# Altium PCB EtherWizA4.PcbDoc
Units mil, origin at the board's own origin, x right, y up, seen from the top; angles counter-clockwise.
Board outline 4763.78 x 2346.46 mil, 5 copper layers (Top Layer, GND, 5V, Mid-Layer 5, Bottom Layer), stack 36.923 mil thick; 51 components, 123 nets, 250 pads, 111 vias.
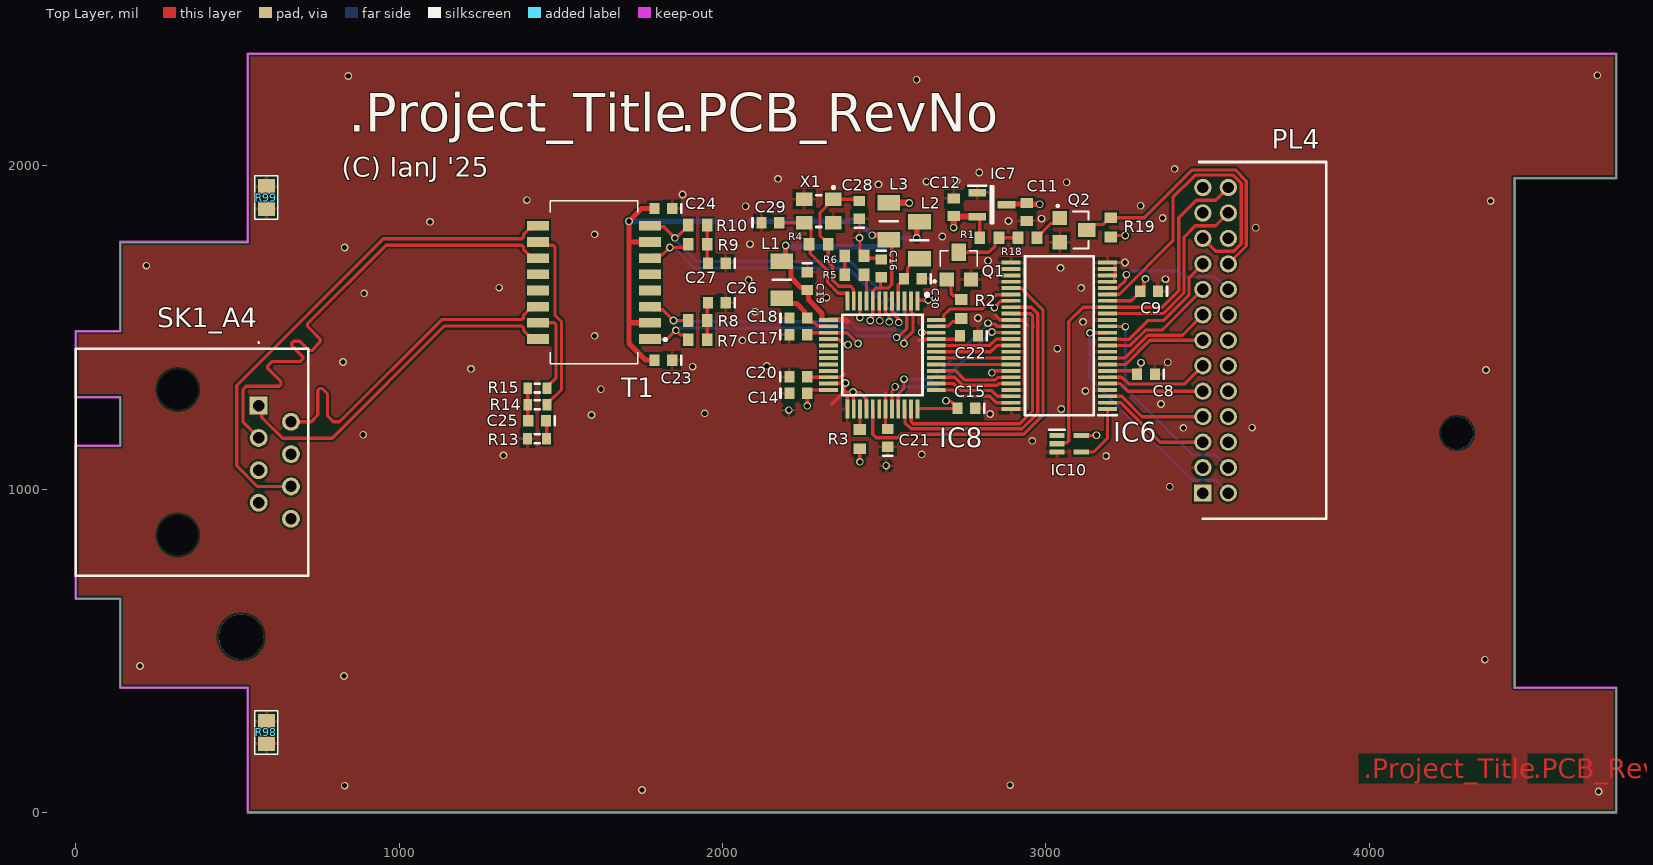
[diagram p0: Top Layer view]
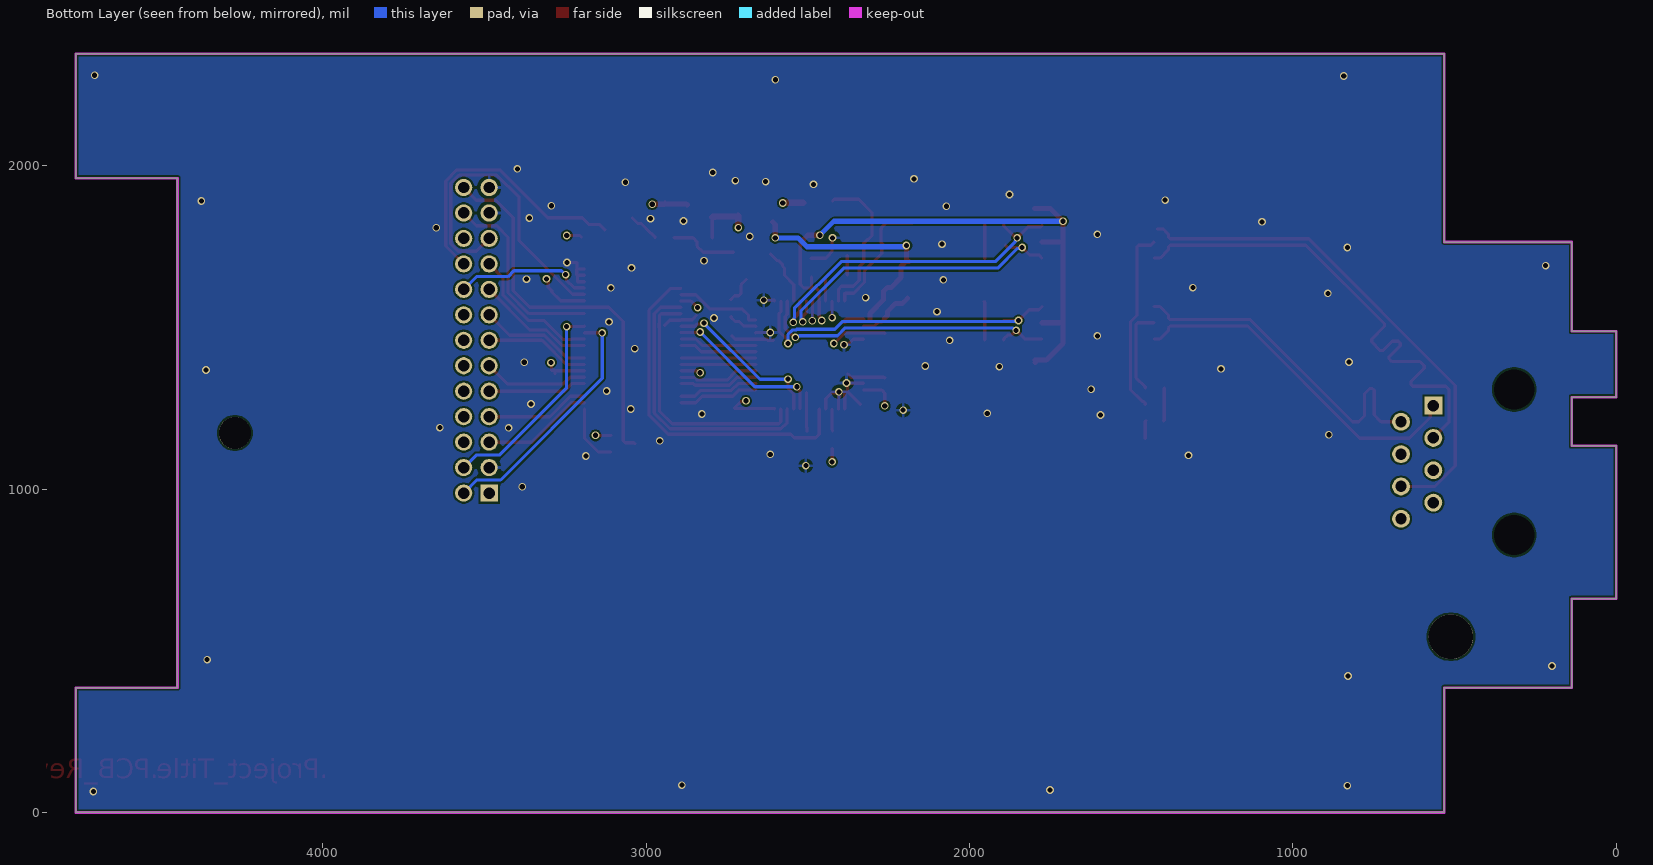
[diagram p1: Bottom Layer view, seen from below]
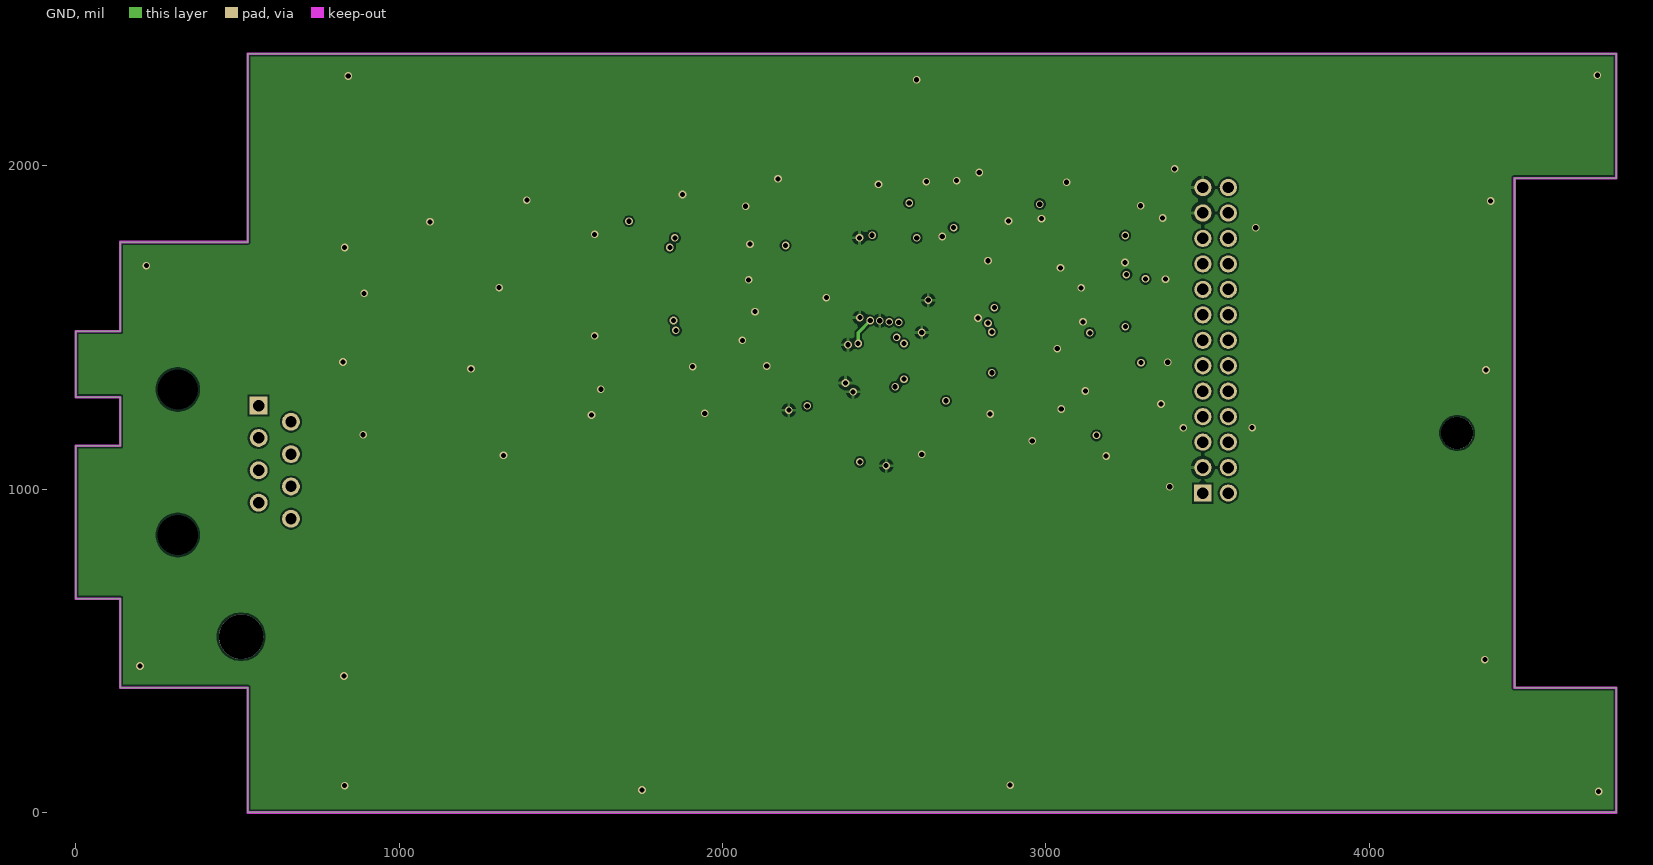
[diagram p2: GND]
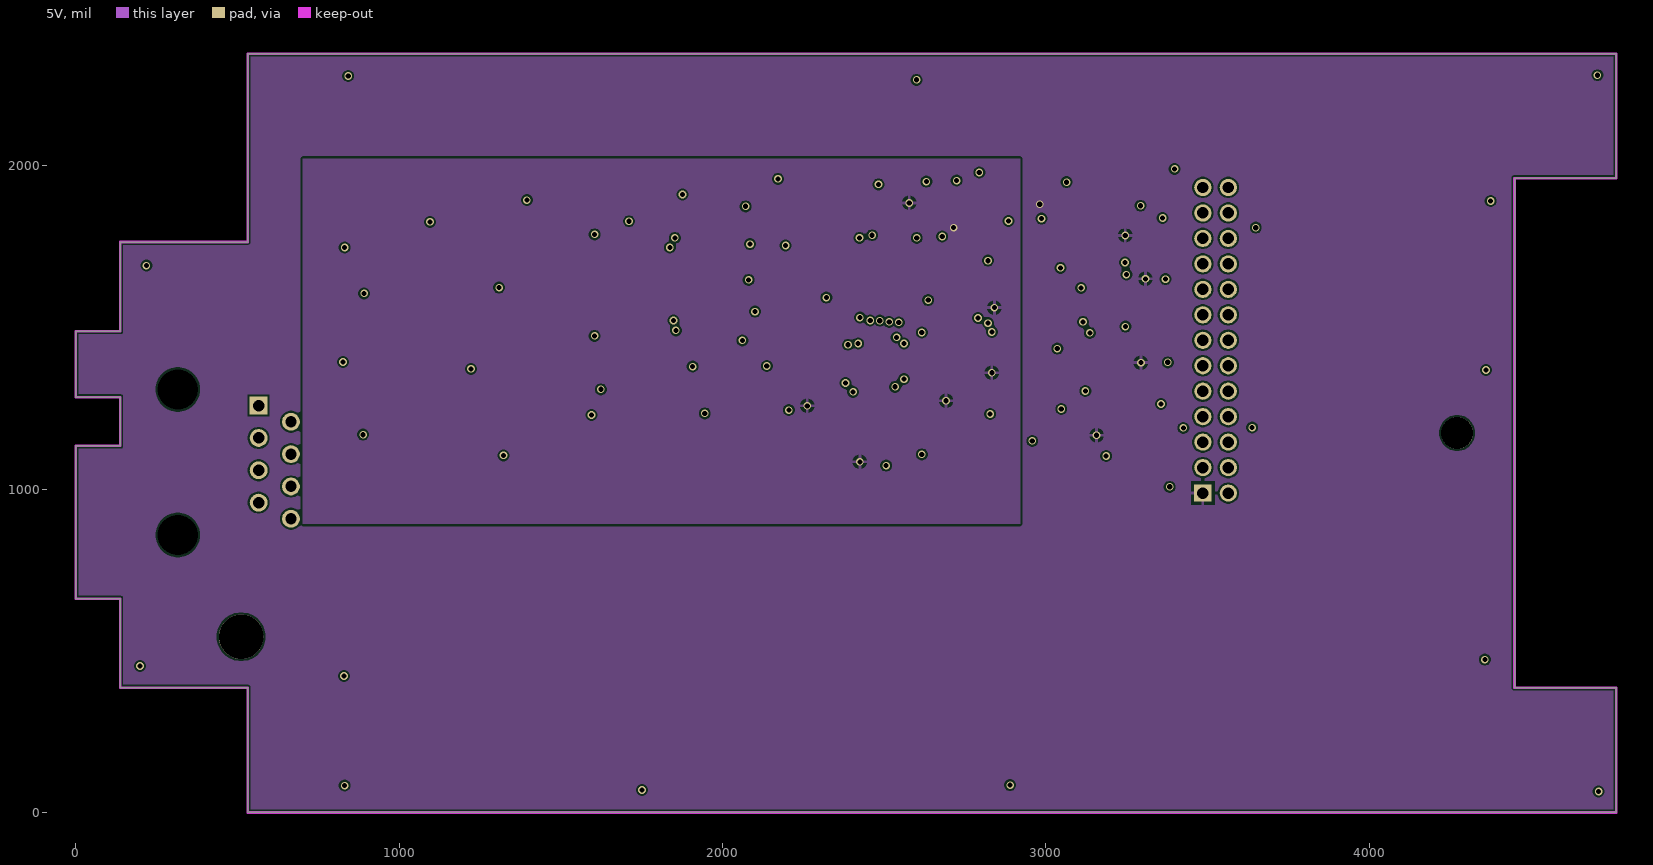
[diagram p3: 5V]
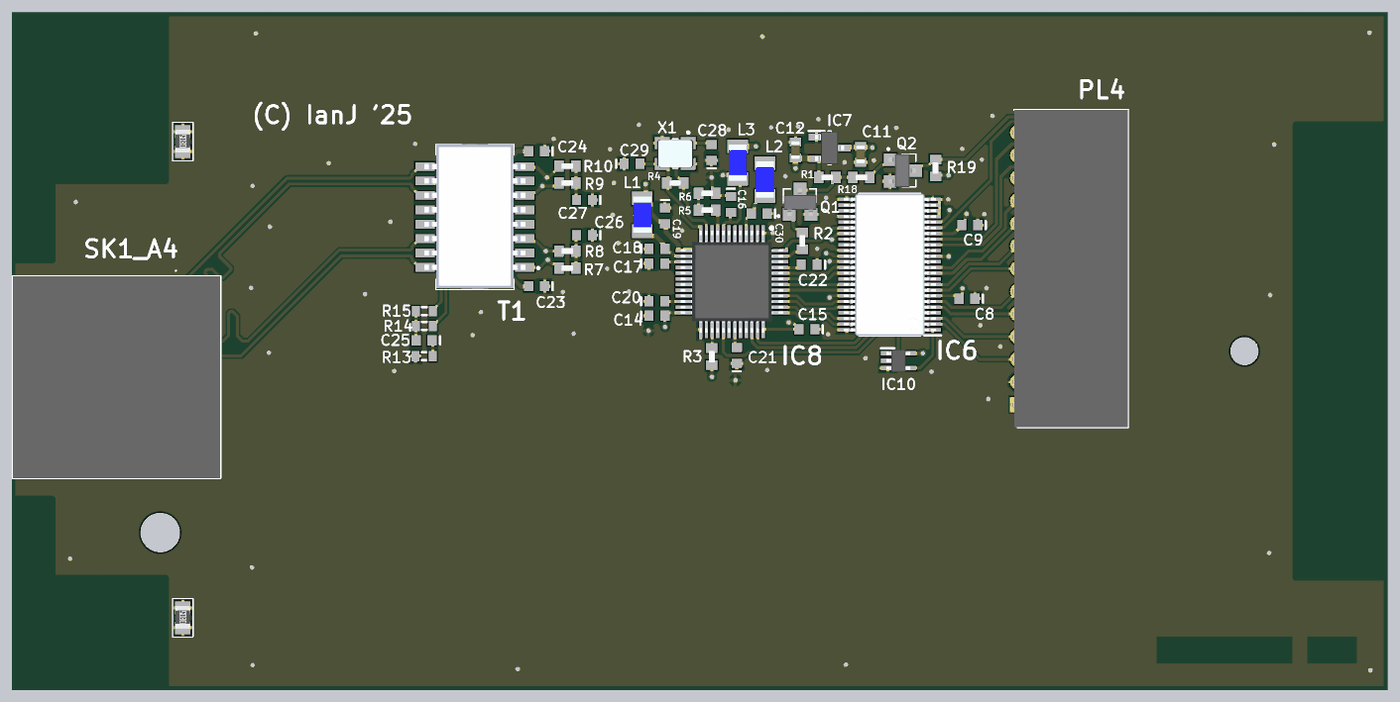
[diagram p4: 3D render of the assembled board from above, using the file's embedded part models]

## Layer stack, top to bottom
Top Solder: solder mask 0.4, Solder Resist, Dk 3.5
Top Layer: signal copper 1.4
Dielectric 1: prepreg 2.8, PP-006, Dk 4.1
GND: signal copper 1.378
Dielectric 2: prepreg 11.811, PP-006, Dk 4.1
5V: signal copper 1.378
Dielectric2: dielectric 12.6, FR-4, Dk 4.8
Mid-Layer 5: signal copper 1.4
Dielectric4: dielectric 2.7559, FR-4, Dk 4.8
Bottom Layer: signal copper 1.4
Bottom Solder: solder mask 0.4, Solder Resist, Dk 3.5

## Board outline
138.17,385.83 138.17,661.42 0.37,661.42 0.37,1133.86 138.17,1133.86 138.17,1283.46 0.37,1283.46 0.37,1488.19 138.17,1488.19 138.17,1763.78 531.87,1763.78 531.87,2346.46 4764.15,2346.46 4764.15,1960.63 4449.19,1960.63 4449.19,385.83 4764.15,385.83 4764.15,0 531.87,0 531.87,385.83

## Design rules (kind name [scope] priority, off if disabled: settings)
Clearance [All] p1: gap=5.91 ignorepadtopadclearanceinfootprint=FALSE
DiffPairsRouting [All] p1: maxlimit=10 minlimit=10 mostfreqgap=10 toplayer_minwidth=10 toplayer_maxwidth=15 toplayer_prefwidth=10 midlayer1_minwidth=10 midlayer1_maxwidth=15 midlayer1_prefwidth=10 midlayer2_minwidth=10 midlayer2_maxwidth=15 midlayer2_prefwidth=10 midlayer5_minwidth=10 midlayer5_maxwidth=15 midlayer5_prefwidth=10 bottomlayer_minwidth=10 bottomlayer_maxwidth=15 bottomlayer_prefwidth=10 maxuncoupledlength=500
HoleSize [All] p1: absolutevalues=TRUE maxlimit=157.48 minlimit=1 maxpercent=80.000 minpercent=20.000
MinimumSolderMaskSliver [All] p1: minsoldermaskwidth=1
PolygonConnect [All] p1: connectstyle=Relief reliefconductorwidth=10 reliefentries=4 polygonreliefangle="90 Angle" airgapwidth=10
RoutingVias [All] p1: holewidth=28 width=50 viastyle="Through Hole" minholewidth=15 minwidth=20 maxholewidth=28 maxwidth=50
SilkToSilkClearance [All] p1: silktosilkclearance=3.94
SilkToSolderMaskClearance [IsPad] p1: minsilkscreentomaskgap=3.94 clearancetoexposedcopper=TRUE
SolderMaskExpansion [All] p1: expansion=4 istentingtop=FALSE
SupplyNets "Schematic Supply Nets_9" [InNet('12V')] p1: voltage=0.000
SupplyNets "Schematic Supply Nets_8" [InNet('1v2d')] p2: voltage=0.000
SupplyNets "Schematic Supply Nets_7" [InNet('3v3a')] p3: voltage=0.000
SupplyNets "Schematic Supply Nets_6" [InNet('-5V')] p4: voltage=0.000
SupplyNets "Schematic Supply Nets_5" [InNet('1v2o')] p5: voltage=0.000
SupplyNets "Schematic Supply Nets_4" [InNet('GND_CHASS')] p6: voltage=0.000
SupplyNets "Schematic Supply Nets_3" [InNet('GND')] p7: voltage=0.000
SupplyNets "Schematic Supply Nets_2" [InNet('1v2a')] p8: voltage=0.000
SupplyNets "Schematic Supply Nets_1" [InNet('3v3')] p9: voltage=0.000
SupplyNets "Schematic Supply Nets" [InNet('5V')] p10: voltage=0.000
Width [All] p1: maxlimit=19.68 minlimit=10 preferedwidth=10
25 further rules are at their usual default settings.

## Classes and differential pairs
component class EtherWiz: C8 C9 C11 C12 C14 C15 C16 C17 C18 C19 C20 C21 C22 C23 C24 C26 C27 C28 C29 C30 IC6 IC7 IC8 IC10 L1 L2 L3 PL4 Q1 Q2 R1 R2 R3 R4 R5 R6 R7 R8 R9 R10 R14 R15 R18 R19 T1 X1
differential pair TX: +TX_P -TX_N
differential pair RX: +RX_P -RX_N
differential pair ETX: +ETX_P -ETX_N
differential pair ERX: +ERX_P -ERX_N

## Components (designator, comment, footprint, x,y, rotation, side; value= is the part's Value field where it differs from the comment)
C8 "100n" CAPC1608L 3309.48,1355.61 r180 top
C9 "100n" CAPC1608L 3319.46,1611.34 r180 top
C11 "1uF" CAPC1608X90N 2940.52,1856.78 r90 top
C12 "1uF" CAPC1608X90N 2714.99,1871.35 r270 top
C14 "100n" CAPC1608L 2234.68,1296.55 r0 top
C15 "100n" CAPC1608L 2754.36,1249.31 r180 top
C16 "100n" CAPC1608L 2490.58,1682.38 r270 top
C17 "100n" CAPC1608L 2234.53,1477.61 r0 top
C18 "100nF" CAPC1608L 2234.68,1528.83 r0 top
C19 "100nF" CAPC1608L 2262.24,1643.01 r270 top
C20 "100nF" CAPC1608L 2234.53,1346.61 r0 top
C21 "100nF" CAPC1608L 2511.25,1158.2 r90 top
C22 "100nF" CAPC1608L 2762.24,1473.72 r180 top
C23 "100nF" CAPC1608L 1817.35,1398.91 r180 top
C24 "100nF" CAPC1608L 1817.35,1867.42 r180 top
C25 "1nF" CAPC1608L 1427,1211 r180 top
C26 "100nF" CAPC1608L 1982.71,1576.08 r180 top
C27 "100nF" CAPC1608L 1982.71,1698.13 r180 top
C28 "24pF" CAPC1608L 2423.65,1863.48 r90 top
C29 "24pF" CAPC1608L 2148.06,1824.11 r0 top
C30 "100nF" CAPC1608L 2589.01,1650.88 r180 top
IC6 "74ALVC164245DGG_11" SOP50P810X120-48N 3041.76,1473.72 r180 top
IC7 "MCP1703AT-3302E_CB" SOT95P255X145-3N 2833.1,1879.23 r0 top
IC8 "W6100L" QFP50P900X900X160-48N 2494.52,1414.66 r270 top
IC10 "SN74LVC1G04DCKR" SOT65P210X110-5N 3072,1140 r0 top
L1 "782763800" INDC3216X130N 2183.5,1646.95 r90 top
L2 "782763800" INDC3216X130N 2608.69,1768.99 r270 top
L3 "782763800" INDC3216X130N 2514.2,1828.05 r270 top
PL4 "DF11-26DP-2DS_52_" SHDRRA26W50P200_2X13_2800X1000X500P 3485.41,987.56 r270 top locked
Q1 "BC846" SOT-23 2730.74,1690.25 r0 top
Q2 "BC846" SOT-23 3085.07,1800.49 r270 top
R1 "100K" RESC1608X50N 2825.23,1776.87 r180 top
R2 "2K2" RESC1608X50N 2738.61,1556.39 r90 top
R3 "2K2" RESC1608X50N 2424.63,1154.27 r270 top
R4 "1M" RESC1608X50N 2297.67,1757.18 r0 top
R5 "12K" RESC1608X50N 2407.91,1662.69 r0 top
R6 "300R" RESC1608X50N 2407.91,1721.75 r180 top
R7 "50R" RESC1608X50N 1923.65,1461.91 r180 top
R8 "50R" RESC1608X50N 1923.65,1520.96 r180 top
R9 "50R" RESC1608X50N 1923.65,1757.18 r180 top
R10 "50R" RESC1608X50N 1923.65,1816.24 r180 top
R13 "0R" RESC1608L 1427,1156 r0 top
R14 "75R" RESC1608L 1427.59,1261.12 r0 top
R15 "75R" RESC1608L 1427.59,1312.3 r0 top
R18 "2K2" RESC1608X50N 2943.34,1776.87 r0 top
R19 "100K" RESC1608X50N 3200.39,1809.07 r270 top
R98 "0R" "RES 0805" 590.15,247.46 r90 top
R99 "0R" "RES 0805" 590.16,1901.16 r90 top
SK1_A4 "MTJ-880X1" MTJ880X1 566,1258 r270 top locked
T1 "PT61017PEL" PT61017PEL 1628.38,1639.07 r90 top
X1 "25MHz" ABM810000MHZ12D2W 2297.67,1859.54 r180 top

## Footprints (in the part's own frame and the unit in brackets; to place one, negate y for a bottom-side part, rotate by r counter-clockwise, add the part's x,y. Pads: shape width x height; smd on the part's side, far side on the other; paste and mask are expansions set on the pad)
ABM810000MHZ12D2W [mm]
  rect 1.3x1.05 smd: 1(-1.15,-0.925) 2(1.15,-0.925) 3(1.15,0.925) 4(-1.15,0.925)
  silkscreen extent -1.25,-1.95 0.2,1.25, body extent -1.6,-1.25 1.6,1.25, height 0.8
CAPC1608L [mm] "Chip Capacitor, Body 1.6x0.8mm, IPC High Density"
  rect 0.8x0.9 smd: 1(-0.7,0) 2(0.7,0)
  silkscreen extent -1.4,-0.35 -1.4,0.35, body extent -0.87,-0.48 0.87,0.48, height 0.85
CAPC1608X90N [mm]
  rect 0.78x0.99 smd: 1(-0.7,0) 2(0.7,0)
  body extent -0.8,-0.41 0.8,0.41, height 0.9
INDC3216X130N [mm]
  rect 1.2x1.8 smd: 1(-1.45,0) 2(1.45,0)
  silkscreen extent 0,-0.7 0,0.7, body extent -1.6,-0.8 1.6,0.8, height 1.3
MTJ880X1 [mm]
  rect 1.4x1.4 hole 0.9: 1(0,0)
  round 1.4 hole 0.9: 2(1.27,2.54) 3(2.54,0) 4(3.81,2.54) 5(5.08,0) 6(6.35,2.54) 7(7.62,0) 8(8.89,2.54)
  round 1.585 hole 3.17 unplated: MH1(-1.27,-6.35) MH2(10.16,-6.35)
  silkscreen extent -5,-14.35 13.34,3.91, body extent -4.45,-14.35 13.34,3.91, height 13.08
PT61017PEL [mm]
  rect 0.76x1.7 smd: 1(-4.445,-3.75) 2(-3.175,-3.75) 3(-1.905,-3.75) 4(-0.635,-3.75) 5(0.635,-3.75) 6(1.905,-3.75) 7(3.175,-3.75) 8(4.445,-3.75) 9(4.445,5.05) 10(3.175,5.05) 11(1.905,5.05) 12(0.635,5.05) 13(-0.635,5.05) 14(-1.905,5.05) 15(-3.175,5.05) 16(-4.445,5.05)
  silkscreen extent -6.4,-5.05 6.4,4.1, body extent -6.33,-3.8 6.45,5.1, height 5.14
QFP50P900X900X160-48N [mm]
  rect 1.475x0.3 smd: 1(-4.238,2.75) 2(-4.238,2.25) 3(-4.238,1.75) 4(-4.238,1.25) 5(-4.238,0.75) 6(-4.238,0.25) 7(-4.238,-0.25) 8(-4.238,-0.75) 9(-4.238,-1.25) 10(-4.238,-1.75) 11(-4.238,-2.25) 12(-4.238,-2.75) 25(4.238,-2.75) 26(4.238,-2.25) 27(4.238,-1.75) 28(4.238,-1.25) 29(4.238,-0.75) 30(4.238,-0.25) 31(4.238,0.25) 32(4.238,0.75) 33(4.238,1.25) 34(4.238,1.75) 35(4.238,2.25) 36(4.238,2.75)
  rect 0.3x1.475 smd: 13(-2.75,-4.238) 14(-2.25,-4.238) 15(-1.75,-4.238) 16(-1.25,-4.238) 17(-0.75,-4.238) 18(-0.25,-4.238) 19(0.25,-4.238) 20(0.75,-4.238) 21(1.25,-4.238) 22(1.75,-4.238) 23(2.25,-4.238) 24(2.75,-4.238) 37(2.75,4.238) 38(2.25,4.238) 39(1.75,4.238) 40(1.25,4.238) 41(0.75,4.238) 42(0.25,4.238) 43(-0.25,4.238) 44(-0.75,4.238) 45(-1.25,4.238) 46(-1.75,4.238) 47(-2.25,4.238) 48(-2.75,4.238)
  silkscreen extent -4.85,-3.15 3.15,3.63, body extent -4.5,-4.5 4.5,4.5, height 1.6
"RES 0805" [mm] "Chip Resistor, 2-Leads, Body 2.00x1.25mm, IPC Medium Density"
  rect 1.15x1.35 smd: 1(-0.875,0) 2(0.875,0)
  silkscreen extent -1.7,-0.9 1.7,0.9, body extent -0.95,-0.62 1.05,0.63, height 0.6
RESC1608L [mm] "Chip Resistor, Body 1.6x0.8mm, IPC High Density"
  rect 0.7x0.9 smd: 1(-0.75,0) 2(0.75,0)
  silkscreen extent -0.2,-0.35 0.2,0.35, body extent -0.8,-0.41 0.8,0.41, height 0.45
RESC1608X50N [mm]
  rect 0.85x1 smd: 1(-0.75,0) 2(0.75,0)
  body extent -0.5,-0.25 0.5,0.25, height 0.35
SHDRRA26W50P200_2X13_2800X1000X500P [mm]
  rect 1.35x1.35 hole 0.9: 1(0,0)
  round 1.35 hole 0.9: 2(0,2) 3(-2,0) 4(-2,2) 5(-4,0) 6(-4,2) 7(-6,0) 8(-6,2) 9(-8,0) 10(-8,2) 11(-10,0) 12(-10,2) 13(-12,0) 14(-12,2) 15(-14,0) 16(-14,2) 17(-16,0) 18(-16,2) 19(-18,0) 20(-18,2) 21(-20,0) 22(-20,2) 23(-22,0) 24(-22,2) 25(-24,0) 26(-24,2)
  silkscreen extent -26,-0.3 2,9.7, body extent -26,-0.3 2,9.7, height 5
SOP50P810X120-48N [mm]
  rect 1.475x0.3 smd: 1(-3.788,5.75) 2(-3.788,5.25) 3(-3.788,4.75) 4(-3.788,4.25) 5(-3.788,3.75) 6(-3.788,3.25) 7(-3.788,2.75) 8(-3.788,2.25) 9(-3.788,1.75) 10(-3.788,1.25) 11(-3.788,0.75) 12(-3.788,0.25) 13(-3.788,-0.25) 14(-3.788,-0.75) 15(-3.788,-1.25) 16(-3.788,-1.75) 17(-3.788,-2.25) 18(-3.788,-2.75) 19(-3.788,-3.25) 20(-3.788,-3.75) 21(-3.788,-4.25) 22(-3.788,-4.75) 23(-3.788,-5.25) 24(-3.788,-5.75) 25(3.788,-5.75) 26(3.788,-5.25) 27(3.788,-4.75) 28(3.788,-4.25) 29(3.788,-3.75) 30(3.788,-3.25) 31(3.788,-2.75) 32(3.788,-2.25) 33(3.788,-1.75) 34(3.788,-1.25) 35(3.788,-0.75) 36(3.788,-0.25) 37(3.788,0.25) 38(3.788,0.75) 39(3.788,1.25) 40(3.788,1.75) 41(3.788,2.25) 42(3.788,2.75) 43(3.788,3.25) 44(3.788,3.75) 45(3.788,4.25) 46(3.788,4.75) 47(3.788,5.25) 48(3.788,5.75)
  silkscreen extent -4.52,-6.25 2.7,6.25, body extent -4.06,-6.25 4.06,6.25, height 1
SOT65P210X110-5N [mm]
  rect 1.2x0.4 smd: 1(-0.95,0.65) 2(-0.95,0) 3(-0.95,-0.65) 4(0.95,-0.65) 5(0.95,0.65)
  silkscreen extent -1.55,1.1 -0.35,1.1, body extent -1.05,-1 1.05,1, height 1
SOT95P255X145-3N [mm]
  rect 1.4x0.6 smd: 1(-1.15,0.95) 2(-1.15,-0.95) 3(1.15,0)
  silkscreen extent -1.85,-1.45 0.1,1.5, body extent -1.28,-1.45 1.28,1.45, height 1.45
SOT-23 [mil]
  rect 44x44 smd: 1(-37.5,-42) 2(37.5,-42)
  rect 44x54 smd: 3(-0.25,42)
  silkscreen extent -79,-52 57,47, body extent -57,-47 57,47, height 40

## Part data
C8 C9 C14 C15 C16 C17: library part CAP_100n_0603_50V_0, "CAP 100nF, 0603, 50V, X7R, 10%", Distributor1 Part No=CL10B104KB8NNNC, Distributor2 Part No=311-1344-2-ND, Manufacturer1=Samsung, Manufacturer2=Yageo, Voltage=50V, ComponentLink1Description=ComponentLinknURL1, ComponentLink1URL=https://media.digikey.com/pdf/Data%20Sheets/Samsung%20PDFs/CL_Series_MLCC_ds.pdf, ComponentLink2Description=ComponentLinknURL2, ComponentLink2URL=https://www.yageo.com/upload/media/product/productsearch/datasheet/mlcc/UPY-GPHC_X7R_6.3V-to-50V_18.pdf, Distributor1=Anglia, Distributor2=Digikey, ManuPart1=CL10B104KB8NNNC, ManuPart2=CC0603KRX7R9BB104
C11 C12: library part CL10A105KP8NNNC, "Capacitor", Manufacturer_Name=SAMSUNG, Mouser Part Number=187-CL10A105KP8NNNC, Arrow Part Number=CL10A105KP8NNNC, Arrow Price/Stock=https://www.arrow.com/en/products/cl10a105kp8nnnc/samsung-electro-mechanics?utm_currency=USD&region=nac, Datasheet Link=https://datasheet.lcsc.com/szlcsc/Samsung-Electro-Mechanics-CL10A105KP8NNNC_C26413.pdf, Height=0.9mm, Manufacturer_Part_Number=CL10A105KP8NNNC, Mouser Price/Stock=https://www.mouser.co.uk/ProductDetail/Samsung-Electro-Mechanics/CL10A105KP8NNNC?qs=349EhDEZ59qtu6tL%2F73n2A%3D%3D
C18 C19 C20 C21 C22 C30: library part 100nF0805, "Capacitor", Arrow Part Number=C2012X7R1H104K125AM, LCSC Part #=C111492, Manufacturer_Name=TDK, Mouser Part Number=810-C2012X7R1H104KT5, Arrow Price/Stock=https://www.arrow.com/en/products/c2012x7r1h104k125am/tdk, Datasheet Link=https://product.tdk.com/info/en/catalog/datasheets/mlcc_commercial_midvoltage_en.pdf, Height=1.45mm, Manufacturer_Part_Number=C2012X7R1H104K125AM, Mouser Price/Stock=https://www.mouser.com/Search/Refine.aspx?Keyword=810-C2012X7R1H104KT5
C23 C24 C26 C27: library part 909-0001-L, "Cap ceramic X7R/X5R 100nF 10% 16V C0603", Disti Part Number=432-210, LCSC Part #=C66501, Manufacturer=EPCOS, Tolerance=0.1, Voltage=16V, Component Type=Standard, Construction=X7R, Cost(£)=0.038, Distributer=Farnell, ManuPart=B37931-K9104-K60, Qualified2ndManu=Yageo, Qualified2ndPart=CC0603KRX7R7BB104, RoHS Compliant=YES
C25: library part 910-0053-L, "Cap ceramic X7R 1nF 10% 2kV C1206", Disti Part Number=1206GC102KAT1A, LCSC Part #=C23631, Manufacturer=AVX, Tolerance=0.1, Voltage=2000V, Component Type=Standard, Construction=X7R, Cost(£)=0.187, Distributer=Anglia, ManuPart=1206GC102KAT1A, RoHS Compliant=YES
C28 C29: library part CAP_10P_0603_50V_0, "CAP 10PF, 0603, 50V, NP0, 10%"
IC6: "Integrated Circuit", Arrow Part Number=74ALVC164245DGG:11, Manufacturer_Name=Nexperia, Mouser Part Number=771-74ALVC164245, Arrow Price/Stock=https://www.arrow.com/en/products/74alvc164245dgg11/nexperia?utm_currency=USD&region=nac, Datasheet Link=https://assets.nexperia.com/documents/data-sheet/74ALVC164245.pdf, Height=1.2mm, Manufacturer_Part_Number=74ALVC164245DGG:11, Mouser Price/Stock=https://www.mouser.co.uk/ProductDetail/Nexperia/74ALVC164245DGG11?qs=odJ8N4Y39o4j0ykFPcnqaQ%3D%3D
IC7: "Integrated Circuit", Arrow Part Number=MCP1703AT-3302E/CB, Manufacturer_Name=Microchip, Mouser Part Number=579-MCP1703AT3302ECB, Arrow Price/Stock=https://www.arrow.com/en/products/mcp1703at-3302ecb/microchip-technology?region=nac, Datasheet Link=http://uk.rs-online.com/web/p/products/7709509, Height=1.45mm, Manufacturer_Part_Number=MCP1703AT-3302E/CB, Mouser Price/Stock=https://www.mouser.co.uk/ProductDetail/Microchip-Technology/MCP1703AT-3302E-CB?qs=PZkJWYMe7leeY97bgTp%252B9w%3D%3D
IC8: "Integrated Circuit", Manufacturer_Name="WIZnet Inc", Mouser Part Number=950-W6100L, Datasheet Link=https://eu.mouser.com/datasheet/2/443/w6100_ds_v104e-1994614.pdf, Height=1.6mm, Manufacturer_Part_Number=W6100L, Mouser Price/Stock=https://www.mouser.co.uk/ProductDetail/WIZnet/W6100L?qs=pUKx8fyJudARLmbJE2EKlA%3D%3D
IC10: "Integrated Circuit", Manufacturer_Name="Texas Instruments", Mouser Part Number=595-SN74LVC1G04DCKR, Arrow Part Number=SN74LVC1G04DCKR, Arrow Price/Stock=https://www.arrow.com/en/products/sn74lvc1g04dckr/texas-instruments?region=nac, Datasheet Link=http://www.ti.com/lit/ds/symlink/sn74lvc1g04.pdf, Height=1.1mm, Manufacturer_Part_Number=SN74LVC1G04DCKR, Mouser Price/Stock=https://www.mouser.co.uk/ProductDetail/Texas-Instruments/SN74LVC1G04DCKR?qs=dT9u2OTAaVWNPsQmeXyvkg%3D%3D
L1 L2 L3: library part 74279215, "Inductor", Manufacturer_Name="Wurth Elektronik", Mouser Part Number=710-782763800, Datasheet Link=http://componentsearchengine.com/Datasheets/1/74279215.pdf, Height=1.3mm, Manufacturer_Part_Number=782763800, Mouser Price/Stock=https://www.mouser.co.uk/ProductDetail/Wurth-Elektronik/74279215?qs=5twSNpOB8IC%252BebnV0jQtuw%3D%3D
PL4: "Connector", Arrow Part Number=DF11-26DP-2DS(52), Manufacturer_Name=Hirose, Mouser Part Number=798-DF11-26DP-2DS52, Arrow Price/Stock=https://www.arrow.com/en/products/df11-26dp-2ds-52/hirose-electric, Datasheet Link=https://www.hirose.com/product/document?clcode=CL0543-0544-8-52&productname=DF11-26DP-2DS(52)&series=DF11&documenttype=2DDrawing&lang=en&documentid=0000995291, Height=5mm, Manufacturer_Part_Number=DF11-26DP-2DS(52), Mouser Price/Stock=https://www.mouser.co.uk/ProductDetail/Hirose-Connector/DF11-26DP-2DS52?qs=Ux3WWAnHpjAoQVMFZWdmwg%3D%3D
Q1 Q2: library part TRANS_NPN_BC846_0, "Transistor NPN, 65V, 100mA, TO-236AB/SOT23"
R1 R19: library part 920-0030-L, "Resistor 100K 1%  0603"
R2 R3 R18: library part 920-0030-L, "Resistor 2K2 1%  0603", Disti Part Number=2447434, LCSC Part #=C127449, Manufacturer=Multicomp, Power=63mW, Tolerance=0.01, Component Type=Standard, Construction="Thick Film", Cost(£)=0.025, Distributer=Farnell, ManuPart=MCWR06X75R0FTL, RoHS Compliant=YES
R4: library part 920-0030-L, "Resistor 1M 1%  0603", Disti Part Number=2447434, LCSC Part #=C127449, Manufacturer=Multicomp, Power=63mW, Tolerance=0.01, Component Type=Standard, Construction="Thick Film", Cost(£)=0.025, Distributer=Farnell, ManuPart=MCWR06X75R0FTL, RoHS Compliant=YES
R5: library part 920-0030-L, "Resistor 12K 1%  0603", Disti Part Number=2447434, LCSC Part #=C127449, Manufacturer=Multicomp, Power=63mW, Tolerance=0.01, Component Type=Standard, Construction="Thick Film", Cost(£)=0.025, Distributer=Farnell, ManuPart=MCWR06X75R0FTL, RoHS Compliant=YES
R6: library part 920-0030-L, "Resistor 300R 1%  0603", Disti Part Number=2447434, LCSC Part #=C127449, Manufacturer=Multicomp, Power=63mW, Tolerance=0.01, Component Type=Standard, Construction="Thick Film", Cost(£)=0.025, Distributer=Farnell, ManuPart=MCWR06X75R0FTL, RoHS Compliant=YES
R7 R8 R9 R10: library part 920-0030-L, "Resistor 50R 1%  0603", Disti Part Number=2447434, LCSC Part #=C127449, Manufacturer=Multicomp, Power=63mW, Tolerance=0.01, Component Type=Standard, Construction="Thick Film", Cost(£)=0.025, Distributer=Farnell, ManuPart=MCWR06X75R0FTL, RoHS Compliant=YES
R13: library part 920-0001-L, "Resistor 0R0 1A Max 0603", Disti Part Number=923-3130, LCSC Part #=C844718, Manufacturer=Vishay, Component Type=Standard, Construction="Thick Film", Cost(£)=0.056, Distributer=Farnell, ManuPart=CRCW06030000Z0EA, Qualified2ndManu=Yageo, Qualified2ndPart=RC0603JR-070RL, RoHS Compliant=YES
R14 R15: library part 920-0030-L, "Resistor 75R 1%  0603", Disti Part Number=2447434, LCSC Part #=C127449, Manufacturer=Multicomp, Power=63mW, Tolerance=0.01, Component Type=Standard, Construction="Thick Film", Cost(£)=0.025, Distributer=Farnell, ManuPart=MCWR06X75R0FTL, RoHS Compliant=YES
R98 R99: library part RES_0R_0805_5PCT_0, "RES 0R, 0805, 2A, 5%, +/-200PPM", Distributor1 Part No=RW000, Distributor2 Part No=311-0.0ARTR-ND, Manufacturer1=EUROHM, Manufacturer2=Yageo, Martel Part No=R00A, Tolerance=5%, ComponentLink1Description=ComponentLinknURL1, ComponentLink1URL=http://resources.anglia.com/pdf/product/eur/datasheets/smr_series(2).pdf, ComponentLink2Description=ComponentLinknURL2, ComponentLink2URL=https://www.yageo.com/upload/media/product/productsearch/datasheet/rchip/PYu-RC_Group_51_RoHS_L_10.pdf, Distributor1=Anglia, Distributor2=Digikey, ManuPart1=U9U5RRR1000, ManuPart2=RC0805JR-070RL
SK1_A4: "Connector", Manufacturer_Name="Adam Tech", Mouser Part Number=737-MTJ-880X1, Arrow Part Number=MTJ-880X1, Arrow Price/Stock=https://www.arrow.com/en/products/mtj-880x1/adam-tech?region=nac, Datasheet Link=https://app.adam-tech.com/products/download/data_sheet/203795/mtj-880x1-data-sheet.pdf, Height=12.9794mm, Manufacturer_Part_Number=MTJ-880X1, Mouser Price/Stock=https://www.mouser.co.uk/ProductDetail/Adam-Tech/MTJ-880X1?qs=TTVbHWoAP%2FTHQFSSStritA%3D%3D
T1: "Transformer", Disti Part Number=652-PT61017PEL, LCSC Part #=C124001, Manufacturer=Bourns, Arrow Price/Stock=https://www.arrow.com/en/products/pt61017pel/bourns?region=europe, Datasheet Link=http://www.bourns.com/docs/Product-Datasheets/pt61017pel.pdf, Distributer=Mouser, Height=5mm, ManuPart=PT61017PEL, Mouser Price/Stock=https://www.mouser.co.uk/ProductDetail/Bourns/PT61017PEL?qs=0rbOLB9uh%252BASY8PB9lbWrQ%3D%3D
X1: library part ABM8-25.000MHZ-D2X-T, "Crystal or Oscillator", Manufacturer_Name=ABRACON, Mouser Part Number=815-ABM825MHZD2XT, Arrow Part Number=ABM8-25.000MHZ-D2X-T, Arrow Price/Stock=https://www.arrow.com/en/products/abm8-25.000mhz-d2x-t/abracon?region=nac, Datasheet Link=https://abracon.com/Resonators/abm8.pdf, Height=0.8mm, Manufacturer_Part_Number=ABM8-25.000MHZ-D2X-T, Mouser Price/Stock=https://www.mouser.co.uk/ProductDetail/ABRACON/ABM8-25.000MHZ-D2X-T?qs=XeJtXLiO41RuPiM7CXbPRQ%3D%3D

## Free pads (board coordinates)
  round 137.8 hole 137.8 unplated: 7(511.81,543.31)
  round 98.43 hole 98.43 unplated: 8(4271.65,1173.23)

## Via types
v1: diameter 23.62, hole 15.75, Top Layer to Bottom Layer, tented both sides, 111 vias

## Nets (pads, with @x,y where several pads share a name; then routed paths per layer and width w, separated by ;. In a path a pad name is that pad's centre, name@x,y a point inside that pad or via, vN(x,y) a via of type N, cw(c..) or ccw(c..) an arc to the next point about the centre after c; other vN are vias at no path point)
1v2a: C30.2 IC8.4 L2.2 | length 175.8
  Top Layer w10: IC8.4 2543.73,1632.29 2572.2,1660.76 2572.2,1683.28 2578.26,1689.35 2578.26,1693.28 2592.04,1707.06 2595.98,1707.06 L2.2@2614.6,1725.69
1v2d: C19.2 C20.2 C21.2 C22.2 IC8.13 IC8.22 IC8.31 IC8.45 L1.2 L2.1 | length 1194.7
  Top Layer w10: C20.2@2262.24,1343.8 2264.2,1345.76 IC8.22 2365.94,1345.76 2375.78,1355.61 2376.41,1355.61 ; C21.2@2502.39,1178.44 2502.39,1190.25 2504.36,1192.22 IC8.31 2504.36,1298.52 ; 2605.91,1460.3 2624.79,1460.3 2627.46,1462.97 2660.46,1462.97 IC8.45 ; IC8.45@2661.94,1463.3 2723.93,1463.3 C22.2@2734.68,1474.05
  Top Layer w15.75: L1.2@2188.05,1704.03 L1.2@2195.31,1704.03 ; v1(2195.31,1753.24) L1.2@2195.31,1704.03 ; IC8.13@2308.23,1524.9 2308.23,1543.12 2266.04,1585.3 2266.04,1611.64 C19.2 2254.36,1623.32 2242.55,1623.32 2211.67,1654.2 2211.67,1688.28 2195.92,1704.03 L1.2@2195.31,1704.03 ; IC8.13@2329.55,1524.81 2379.32,1524.81 2386.53,1517.61 ; v1(2600.82,1776.87) 2600.82,1818.2 L2.1
  Bottom Layer w15.75: v1(2195.31,1753.24) 2197.44,1753.24 2201.37,1749.31 2502.92,1749.31 2530.48,1776.87 v1(2600.82,1776.87)
1v2o: C18.2 IC8.14 L1.1 | length 180.2
  Top Layer w10: C18.2 2262.24,1526.87 2272.98,1516.12 2278.84,1516.12 2282.83,1516.12 2294.8,1504.15 2326.76,1504.15 IC8.14
  Top Layer w15.75: L1.1@2191.37,1589.86 2207.09,1574.14 2228.74,1574.14 2254.36,1548.52 2254.36,1536.71 C18.2
3v3: C12.2 C14.2 C15.2 IC6.31 IC6.42 IC7.2 IC8.24 IC8.36 L3.1 R1.2 R3.2 | length 686.7
  Top Layer w10: v1(2262.24,1257.18) C14.2 2272.08,1306.39 IC8.24 ; v1@2424.63,1083.4 R3.2 ; IC8.36 2602.79,1248.4 2603.69,1249.31 C15.2 ; v1(2691.37,1272.93) 2693.98,1270.32 2707.76,1270.32 C15.2@2726.8,1251.28 ; R1.2 IC7.2@2795.7,1839.86 ; v1(2833.1,1359.54) 2836.79,1359.54 2842.69,1365.45 IC6.42 ; v1(2840.98,1561.01) 2861.05,1581.08 2891.72,1581.08 IC6.31
  Top Layer w19.68: L3.1 2514.47,1884.87 2577.26,1884.87 v1(2577.53,1884.61) ; v1(2714.99,1808.36) C12.2@2714.99,1844.91 ; C12.2 2715.98,1842.81 IC7.2@2787.62,1842.81 ; IC7.2 2793.73,1841.83 IC7.2@2795.7,1839.86
  other v1: 2425.11,1084.16
3v3a: C16.2 C17.2 C23.2 C24.2 IC8.8 IC8.15 L3.2 T1.2 T1.7 | length 2147.3
  Top Layer w10: C17.2@2262.24,1481.59 2264.2,1483.56 IC8.15 2385.09,1483.56 2418.56,1450.09 v1(2419.72,1450.09) ; v1(2456.93,1521.07) 2456.93,1524.76 2464.99,1532.82 IC8.8 2465.9,1582.42 2465.9,1613.1 2474.25,1621.45 2488.61,1621.45 ; C16.2@2488.61,1654.82 2488.61,1621.45 ; L3.2 2523.3,1761.87 2523.3,1632.86 2511.89,1621.45 2502.76,1621.45 2488.61,1621.45
  Top Layer w15.75: 1716.62,1514.07 T1.2 ; T1.7 1711.05,1764.07 ; C23.2 C23.2@1797.67,1391.04 ; C23.2@1797.67,1398.91 1762.24,1398.91 1711.05,1450.09 1711.05,1504.11 1711.05,1514.07 1711.05,1764.07 ; C24.2@1798.93,1867.42 1750.42,1867.42 v1(1711.05,1828.05) 1711.05,1764.07 ; v1(2463.02,1784.74) 2500.43,1784.74 L3.2
  GND w10: v1(2419.72,1450.09) 2419.72,1483.86 v1(2456.93,1521.07)
  Bottom Layer w15.75: v1(1711.05,1828.05) 2419.72,1828.05 v1(2463.02,1784.74)
5V: C8.2 C9.2 C11.2 IC6.7 IC6.18 IC7.3 IC10.5 PL4.1 R19.2 | length 506
  Top Layer w10: IC10.5 3109.72,1165.91 3156.37,1165.91 v1(3156.68,1166.22) ; IC6.7 C8.2@3285.52,1365.45 ; IC6.18 3264.51,1581.98 3291.9,1609.37 3291.9,1613.31 3302.65,1624.06 3302.65,1640.96 3308,1646.31 v1(3308,1650) ; R19.2 3204.91,1784.07 v1(3245.39,1784.07) ; C8.2 3281.92,1365.98 3283.46,1367.51 3291.86,1367.51 3292.67,1368.32 3292.67,1389.67 v1(3294,1391)
  Top Layer w15.75: IC7.3@2873.05,1879.12 2875.71,1881.78 2942.94,1881.78 C11.2@2943.34,1882.18 ; C11.2@2941.93,1883.59 2944.78,1880.74 v1(2981.2,1880.74)
12V: 
-5V: 
/BL: 
/ECON: PL4.16
/EFIQ: PL4.22
/IOGT: 
/IORQ: 
/MS: 
/PFIQ: 
/PIRQ: PL4.20 Q2.3 R19.1 | length 863.6
  Top Layer w10: Q2.3 3144.07,1817.74 3176.57,1817.74 3197.43,1838.6 R19.1 3304.6,1838.6 3452.75,1986.75 3585.34,1986.75 3619.91,1952.18 3619.91,1751.41 3564.71,1696.22 PL4.20
/PRE_IORD: IC6.17 IC10.2 PL4.26 | length 1205.8
  Top Layer w10: IC10.2 3037.47,1142.87 3065.14,1142.87 3071,1148.73 3071,1518 3115.3,1562.3 IC6.17 3359.73,1562.3 3411.19,1613.76 3411.19,1838.59 3465.6,1893 3524.71,1893 PL4.26
/PS: 
/PWE_IOWR: IC6.16 PL4.24 | length 602.8
  Top Layer w10: IC6.16 3362.54,1542.61 3427.09,1607.17 3427.09,1779.09 3462,1814 3524.45,1814 PL4.24
/RST: 
/RST_Buf: IC6.19 PL4.21 | length 987.6
  Top Layer w10: IC6.19 3191.8,1602.57 3227.69,1602.57 3393,1767.88 3393,1902 3461.84,1970.84 3578.75,1970.84 3604,1945.6 3604,1758 3581,1735 3524.86,1735 3519,1740.86 3519,1741.37 PL4.21
/S2: PL4.12
/S6: 
/S7: 
BD0: 
BD1: 
BD2: 
BD3: 
BD4: 
BD5: 
BD6: 
BD7: 
BD8: 
BD9: 
BD10: 
BD11: 
BD12: 
BD13: 
BD14: 
BD15: 
C0_IDT: 
C1_ICK: 
CLK2: PL4.14
CLK8: 
D0: IC6.2 PL4.5 | length 345
  Top Layer w10: IC6.2 3231.48,1267.02 3353.47,1145.04 PL4.5
D1: IC6.3 PL4.7 | length 320.6
  Top Layer w10: IC6.3 3234.29,1286.71 3297.22,1223.78 PL4.7
D2: IC6.5 PL4.9 | length 304.3
  Top Layer w10: IC6.5 3229.92,1326.08 3253.48,1302.52 PL4.9
D3: IC6.6 PL4.11 | length 326.4
  Top Layer w10: IC6.6 3235.08,1345.76 3255.85,1325 3429.15,1325 PL4.11
D4: IC6.8 PL4.13 | length 325.5
  Top Layer w10: IC6.8 3246.8,1385.13 3321.67,1460 PL4.13
D5: IC6.9 PL4.15 | length 350
  Top Layer w10: IC6.9 3243.99,1404.82 3315.08,1475.91 3422.57,1475.91 PL4.15
D6: IC6.11 PL4.17 | length 366.3
  Top Layer w10: IC6.11 3260.87,1444.19 3308.57,1491.89 3359.82,1491.89 PL4.17
D7: IC6.12 PL4.19 | length 423.2
  Top Layer w10: IC6.12 3231,1463.87 3232.59,1462.28 3256.47,1462.28 3314.98,1520.79 3363.21,1520.79 3443,1600.59 3443,1653.81 PL4.19
ERX_N: IC8.5 R10.2 T1.8 | length 1053.8
  Top Layer w10: T1.8 1779.06,1811.03 1818.62,1811.03 v1(1852.79,1776.87) 1855.39,1779.47 1860.31,1779.47 1894.13,1813.28 R10.2 ; IC8.5 2524.95,1580.61 2524.95,1549.93 2533.13,1541.75 2533.13,1537.36 2542.63,1527.86 2542.63,1517.95 v1(2545.24,1515.35)
  Bottom Layer w10: v1(1852.79,1776.87) 1852.79,1773.18 1858.98,1766.98 1858.98,1765.15 1920.84,1703.29 2397.07,1703.29 2541.59,1558.77 2541.59,1528.9 2542.63,1527.86 2542.63,1517.95 v1(2545.24,1515.35)
ERX_P: IC8.6 R9.2 T1.6 | length 1001.8
  Top Layer w10: T1.6 1785.98,1724.03 1814.63,1724.03 v1(1837.33,1746.73) 1882.39,1746.73 1889.05,1753.38 R9.2@1889.05,1754.82 ; IC8.6 IC8.6 2504.41,1545.41 2515.41,1534.41 2515.41,1517.16 v1(2515.75,1516.83)
  Bottom Layer w10: v1(1837.33,1746.73) 1839.93,1744.12 1851.72,1744.12 1912.55,1683.29 2388.79,1683.29 2521.59,1550.49 2521.59,1526.36 2515.75,1520.52 v1(2515.75,1516.83)
ETX_N: IC8.2 R8.2 T1.3 | length 1040
  Top Layer w10: T1.3 1785.97,1554.11 1815.7,1554.11 v1(1848.85,1520.96) R8.2 ; v1(2561.45,1450.09) 2564.06,1452.7 2564.06,1462.59 2589.49,1488.03 2589.49,1541.71 2583.1,1548.1 IC8.2
  Bottom Layer w10: v1(1848.85,1520.96) 1851.46,1518.35 2392.5,1518.35 2416.74,1494.11 2534.24,1494.11 2536.81,1491.55 2548.04,1491.55 2561.45,1478.14 v1(2561.45,1450.09)
ETX_P: IC8.3 R7.2 T1.1 | length 971
  Top Layer w10: T1.1 1829.39,1464.07 v1(1856.02,1490.69) 1870.65,1476.06 1882.39,1476.06 1894.13,1464.33 R7.2 ; v1(2538.63,1468.83) 2542.32,1468.83 2550.39,1476.91 2550.53,1476.91 2569.81,1496.18 2569.81,1533.56 2563.42,1539.95 IC8.3
  Bottom Layer w10: v1(1856.02,1490.69) 1859.7,1490.69 1867.36,1498.35 2384.21,1498.35 2408.45,1474.11 2525.96,1474.11 2528.63,1471.44 2536.02,1471.44 v1(2538.63,1468.83)
GND: C8.1 C9.1 C11.1 C12.1 C14.1 C15.1 C16.1 C17.1 C18.1 C19.1 C20.1 C21.1 C22.1 C23.1 C24.1 C26.1 C27.1 C28.1 C29.1 C30.1 IC6.4 IC6.10 IC6.15 IC6.21 IC6.22 IC6.23 IC6.24 IC6.25 IC6.28 IC6.34 IC6.39 IC6.45 IC6.48 IC7.1 IC8.1 IC8.7 IC8.10 IC8.16 IC8.23 IC8.25 IC8.26 IC8.28 IC8.46 IC10.3 PL4.3 PL4.23 PL4.25 Q1.2 Q2.2 R6.1 R13.1 R98.1 R98.2 R99.1 R99.2 X1.2 X1.4 | length 1001.8
  Top Layer w10: IC8.23 2328.57,1326.98 v1@2379.28,1326.98 ; IC8.16 2328.57,1462.97 2359.25,1462.97 2373.46,1448.76 2385.61,1448.76 v1(2388.22,1446.16) ; 2337.04,1261.12 2376.41,1300.49 ; v1(2380.35,1328.05) v1@2379.28,1326.98 ; IC8.25 2386.25,1300.49 ; 2401.36,1286.05 2401.36,1297.88 v1(2403.97,1300.49) ; 2405.03,1286.05 2405.03,1248.72 IC8.26 ; v1(2423.65,1776.87) 2425.7,1774.82 2425.7,1733.48 R6.1 ; v1(2424.98,1530.18) 2425.3,1530.5 2425.3,1581.19 IC8.10 ; R6.1@2435.46,1723.72 2445.31,1713.87 C16.1@2490.58,1713.87 ; IC8.28 2444.4,1248.72 2444.4,1279.4 2425.91,1297.88 2406.57,1297.88 v1(2403.97,1300.49) ; IC8.7 2485.56,1580.62 2485.56,1521.41 v1(2486.45,1520.52) ; IC8.1 2602.79,1583.05 2603.69,1583.95 v1(2636.25,1583.95) ; v1(2616.38,1484.01) 2616.6,1483.79 2661.14,1483.79 IC8.46 ; 2844.91,1536.71 2857.79,1523.83 2891.72,1523.83 IC6.34 2893.54,1522.02 2927.57,1522.02 2942.79,1506.8 ; IC6.21 3211.62,1641.04 3212.53,1641.95 IC6.22@3212.53,1659.58 ; IC6.22 3214.03,1660.72 3214.93,1661.63 3214.93,1679.5 IC6.23@3214.03,1680.41 ; IC6.23 IC6.23@3214.03,1680.41 ; v1(3244.53,1700.61) 3244.27,1700.35 3213.78,1700.35 3213.53,1700.09 3213.53,1680.91 IC6.23@3214.03,1680.41 ; 2376.41,1300.49 2386.25,1300.49 ; 2376.41,1300.49 2377.74,1301.82 2377.74,1325.44 v1@2379.28,1326.98 ; 2386.25,1300.49 v1(2403.97,1300.49)
  other v1: 4709,65 1751.32,69.47 832,83 2889.58,84.52 830,422 199,453 4357.32,472.47 3383,1007 2506.25,1072.34 3186.54,1102.14 1323,1104 2616.37,1107.46 2958,1149 889,1168 3425,1189 3638,1190 1595.39,1229.07 2827.77,1232.09 1945.39,1234.07 2205.39,1244.07 3047.67,1247.5 3356,1263 3122,1303 1623.97,1308.51 4361,1368 1222.57,1371.6 1907.91,1378.68 2137.18,1380.32 3377,1392 827,1393 3035.39,1434.07 2061.53,1459.61 1604.76,1473.72 3115,1517 2790.39,1529.07 2100.82,1548.52 2321.29,1591.83 892,1605 3109,1622 1309.57,1622.6 2081.13,1646.95 3370,1649 3045.39,1684.07 219,1691 2821.29,1706 832,1747 2085.07,1757.18 2679.56,1780.8 1605.08,1787.6 3649.05,1808.07 1096,1826 2884.47,1828.72 2986.65,1835.92 3361,1838 2071.94,1874.3 3293,1876 4375.32,1890.47 1395.46,1893.34 1876.41,1910.72 2482.71,1942.22 3064.19,1948.73 2630.35,1950.44 2724.19,1953.73 2171.94,1959.3 2794.19,1978.73 3398,1990 2600.32,2265.47 843,2277 4705.32,2279.47
GND_CHASS: C25.1 R13.2 | length 55.8
  Top Layer w10: C25.1 1456.53,1209.03 R13.2
LA2: IC6.13 PL4.2 | length 771.1
  Top Layer w10: v1(3136,1483) 3136.28,1483.28 3190.62,1483.28 IC6.13
  Bottom Layer w10: v1(3136,1483) 3136,1342 3450,1028 3523.71,1028 PL4.2
LA3: IC6.14 PL4.4 | length 665
  Top Layer w10: IC6.14 3191.52,1502.62 3245.38,1502.62 v1(3246,1502)
  Bottom Layer w10: v1(3246,1502) 3246,1313 3454,1105 3525.45,1105 PL4.4
LA4: PL4.6
LA5: PL4.8
LA6: 
LA7: 
LA8: 
LA9: 
LA10: 
LA11: 
LA12: 
LA13: 
LA14: 
LA15: 
LINK: IC8.17
NetC25_2: C25.2 R14.1 R15.1 | length 101.9
  Top Layer w10: R15.1 R14.1 1398.06,1212.38 C25.2
NetC26_2: C26.2 R7.1 R8.1 | length 118.9
  Top Layer w10: R7.1 R8.1 1953.18,1578.05 C26.2@1955.15,1580.02
NetC27_2: C27.2 R9.1 R10.1 | length 102.4
  Top Layer w10: C27.2@1953.18,1713.87 1953.18,1765.06 R10.1
NetC28_2: C28.2 IC8.11 R4.2 X1.1 | length 481
  Top Layer w10: IC8.11 2405.03,1582.42 2405.03,1618.32 2396.09,1627.26 2359.02,1627.26 2341.13,1645.14 2341.13,1686.85 2327.2,1700.79 2327.2,1760.13 2315.46,1771.87 2312.51,1771.87 2301.61,1782.77 2301.61,1854.62 X1.1 2418.73,1895.96 C28.2
NetC29_2: C29.2 IC8.12 R4.1 X1.3 | length 397.9
  Top Layer w10: C29.2 2176.61,1823.13 2257.31,1823.13 2272.98,1807.46 2272.98,1802.66 2274.05,1801.6 2274.05,1763.09 R4.1 2271.38,1753.94 2271.38,1728.35 2325.23,1674.5 2325.23,1638.56 2358.24,1605.55 2385.35,1605.55 2386.25,1604.64 IC8.12
NetIC8_9: IC8.9 R5.2 | length 84.4
  Top Layer w10: R5.2 2445.31,1654.82 IC8.9
NetIC8_27: IC8.27 R3.1 | length 68.2
  Top Layer w10: R3.1@2423.65,1180.41 2425.62,1182.38 IC8.27
NetIC8_47: IC8.47 R2.1 | length 89.2
  Top Layer w10: IC8.47 2662.28,1504.15 2698.18,1504.15 2712.12,1518.09 2724.91,1518.09 2736.65,1529.82 R2.1@2736.65,1532.77
NetQ1_1: Q1.1 R2.2 | length 90.7
  Top Layer w10: Q1.1@2689.71,1647.85 2690.52,1647.85 2707.12,1631.25 2707.12,1603.64 2713.1,1597.65 2726.88,1597.65 R2.2
NetQ1_3: Q1.3 R1.1 R18.1 | length 209.9
  Top Layer w10: Q1.3 2823.92,1732.25 2843.02,1751.35 2843.02,1765.13 R1.1 R18.1
NetQ2_1: Q2.1 R18.2 | length 97.3
  Top Layer w10: R18.2 2972.87,1779.82 2984.6,1791.55 2985.58,1791.55 3015.02,1820.99 3026.07,1820.99 Q2.1
NetR5_1: R5.1 R6.2 | length 59.1
  Top Layer w10: R5.1 R6.2
NetR11_1: 
NetR12_1: 
NetR14_2: R14.2 T1.10 | length 575.9
  Top Layer w10: T1.10 1439.52,1754.11 1476.85,1754.11 1482.71,1748.25 1482.71,1536.71 1502.39,1517.02 1502.39,1306.59 1466.76,1270.96 1463.02,1270.96 1457.12,1265.06 R14.2
NetR15_2: R15.2 T1.15 | length 266.3
  Top Layer w10: T1.15 1479.8,1514.07 1485.66,1508.21 1485.66,1344.78 1457.12,1316.24 R15.2
PA0: 
PA1: 
PA2: 
PA3: 
PA4: 
PA5: 
PA6: 
PA7: 
PR/W: PL4.10
REF8M: 
ROM_Latch_nEN: 
ROM_Latch_nSel: 
ROM_nCS: 
RX_N: SK1_A4.6 T1.9 | length 1569.9
  Top Layer w10: SK1_A4.6 561.6,1008 498,1071.6 498,1320.28 951.79,1774.07 1379.33,1774.07 1385.19,1779.93 1385.19,1788.2 1401.09,1804.11 T1.9@1419.6,1804.11
RX_P: SK1_A4.3 T1.11 | length 1570.2
  Top Layer w10: SK1_A4.3 518,1206 518,1308 528,1318 629.6,1318 635.46,1323.86 635.46,1332.14 594.44,1373.16 594.44,1381.44 607,1394 694,1394 703.57,1403.57 703.57,1407.57 668.28,1442.86 668.28,1451.14 674.14,1457 693,1457 721.86,1428.14 730.14,1428.14 756.86,1454.86 756.86,1463.14 717.14,1502.86 717.14,1511.14 960.07,1754.07 1379.33,1754.07 1385.19,1748.21 1385.19,1739.94 1411.06,1714.07 T1.11
SPEED: IC8.18
TX_N: SK1_A4.2 T1.14 | length 1086.6
  Top Layer w10: SK1_A4.2 728,1208 749,1229 749,1305 754.86,1310.86 763.14,1310.86 779,1295 779,1227 796,1210 796,1208 816,1208 1132.07,1524.07 1379.33,1524.07 1385.19,1529.93 1385.19,1538.2 1411.06,1564.07 T1.14
TX_P: SK1_A4.1 T1.16 | length 1086.4
  Top Layer w10: SK1_A4.1 575.7,1248.3 575.7,1221.3 640,1157 793.28,1157 1140.36,1504.07 1379.33,1504.07 1385.19,1498.21 1385.19,1489.94 1411.06,1464.07 T1.16
Wiz5_PR/W: IC6.1 IC10.4 | length 189
  Top Layer w10: IC10.4 3147.41,1114.41 3190.9,1157.9 IC6.1
Wiz_A0: IC6.36 IC8.32 | length 502.2
  Top Layer w10: IC8.32 2524.05,1302.71 2533.89,1312.55 v1(2533.89,1316.24) ; v1(2833.1,1485.53) 2834.17,1484.46 2891.72,1484.46 IC6.36
  Bottom Layer w10: v1(2533.89,1316.24) 2663.81,1316.24 v1(2833.1,1485.53)
Wiz_A1: IC6.35 IC8.33 | length 506.4
  Top Layer w10: IC8.33 2543.73,1293.95 2561.45,1311.67 v1(2561.45,1339.86) ; v1(2821.29,1513.09) 2823.9,1510.48 2841.36,1510.48 2848.59,1503.24 IC6.35
  Bottom Layer w10: v1(2561.45,1339.86) 2648.06,1339.86 v1(2821.29,1513.09)
Wiz_D0: IC6.47 IC8.37 | length 247.6
  Top Layer w10: IC8.37 2712.47,1306.39 2732.16,1286.71 2827.2,1286.71 2846.88,1267.02 IC6.47
Wiz_D1: IC6.46 IC8.38 | length 247.6
  Top Layer w10: IC8.38 2715.28,1326.08 2736.34,1305.02 2831.38,1305.02 2849.69,1286.71 IC6.46
Wiz_D2: IC6.44 IC8.39 | length 243.7
  Top Layer w10: IC8.39 2718.09,1345.76 2742.93,1320.92 2849.1,1320.92 2854.26,1326.08 IC6.44
Wiz_D3: IC6.43 IC8.40 | length 246.8
  Top Layer w10: IC8.40 2720.9,1365.45 2749.52,1336.83 2842.51,1336.83 2850.54,1344.86 2891.72,1344.86 IC6.43
Wiz_D4: IC6.41 IC8.41 | length 231.3
  Top Layer w10: IC8.41 IC6.41
Wiz_D5: IC6.40 IC8.42 | length 231.3
  Top Layer w10: IC8.42 IC6.40
Wiz_D6: IC6.38 IC8.43 | length 239.4
  Top Layer w10: IC8.43 2830.01,1424.5 2849.69,1444.19 IC6.38
Wiz_D7: IC6.37 IC8.44 | length 239.4
  Top Layer w10: IC8.44 2827.2,1444.19 2846.88,1463.87 IC6.37
Wiz_nRD: IC6.32 IC8.34 | length 880.1
  Top Layer w10: IC8.34 2564.32,1246.91 2564.32,1205.11 2583.28,1186.16 2904.31,1186.16 2926.3,1186.16 2974.99,1234.84 2974.99,1491.88 2975.15,1492.04 2975.15,1518.39 2974.99,1518.55 2974.99,1542.44 2955.13,1562.3 IC6.32
Wiz_nRst: IC6.30 IC8.48 | length 271.5
  Top Layer w10: IC8.48 2682.71,1522.93 2683.62,1523.83 2683.62,1536.83 2703.18,1556.39 2801.61,1556.39 2845.98,1600.76 2891.72,1600.76 IC6.30
Wiz_nSel: IC6.29 IC8.29 | length 1089.8
  Top Layer w10: IC8.29 2464.99,1168.88 2475.26,1158.61 2541.61,1158.61 2552.61,1169.61 2932.25,1169.61 2990.9,1228.26 2990.9,1485.29 2991.05,1485.45 2991.05,1524.98 2990.9,1525.13 2990.9,1553.77 2924.21,1620.45 2893.54,1620.45 IC6.29
Wiz_nSel5: IC6.20 PL4.18 | length 427.6
  Top Layer w10: IC6.20 3191.8,1622.26 3222.48,1622.26 3246.39,1646.17 3246.39,1660.39 v1(3249,1663)
  Bottom Layer w10: v1(3249,1663) 3249.67,1663 3261.67,1675 3409,1675 3427,1657 3524.63,1657 PL4.18
Wiz_nWR: IC6.33 IC8.35 | length 797.9
  Top Layer w10: IC8.35 2584.01,1246.91 2584.01,1207.92 2589.87,1202.06 2919.72,1202.06 2959.09,1241.43 2959.09,1498.47 2959.24,1498.62 2959.24,1511.8 2959.09,1511.96 2959.09,1535.85 2953.23,1541.71 2893.54,1541.71 IC6.33
pads on no net: IC6.26 IC6.27 IC8.19 IC8.20 IC8.21 IC8.30 IC10.1 SK1_A4.4 SK1_A4.5 SK1_A4.7 SK1_A4.8 SK1_A4.MH1 SK1_A4.MH2 T1.4 T1.5 T1.12 T1.13

## Polygon pours and split planes (outlines as drawn)
1v2d on Top Layer "1V2D_L01_P000" (solid, remove dead copper, pour order 0): 2371,1539 2616,1539 2616,1289 2371,1289
GND on Top Layer "GND_L01_P005" (solid, remove dead copper, pour order 5): 0.37,0 4764.15,0 4764.15,2346.46 0.37,2346.46
3v3 on 5V "3V3_L03_P001" (solid, pour order 1): 702,2022 702,892 2921,892 2921,2022
5V on 5V "5V_L03_P004" (solid, remove dead copper, pour order 4): 4,0 4764.15,0 4764.15,2346.46 4,2346.46
GND on GND "GND_L02_P002" (solid, remove dead copper, pour order 2): 0.37,0 4764.15,0 4764.15,2346.46 0.37,2346.46
GND on Bottom Layer "GND_L05_P010" (solid, remove dead copper, pour order 10): 0,0 4764.15,0 4764.15,2346.46 0,2346.46

## Keep-outs
Keep-Out Layer:
  lines w8: 0,661 138,661 138,386 532,386 532,0 4764,0 4764,386 4449,386 4449,1961 4764,1961 4764,2346 532,2346 532,1764 138,1764 138,1488 0,1488 0,1284 138,1284 138,1134 0,1134 0,661

## Other copper
Top Layer:
  text ".Project_Title" at 3983.04,105.55 h60
  text ".PCB_RevNo" at 4506.31,105.55 h60

## Silkscreen, mask and mechanical layers (free items; w line width, h text height)
Top Overlay:
  text ".Project_Title" at 844.77,2105.06 h118.11
  text ".PCB_RevNo" at 1868.39,2105.06 h118.11
  text "(C) IanJ '25" at 823.28,1965.45 h60
Board Shape:
  lines w8: 0,661 138,661 138,386 532,386 532,0 4764,0 4764,386 4449,386 4449,1961 4764,1961 4764,2346 532,2346 532,1764 138,1764 138,1488 0,1488 0,1284 138,1284 138,1134 0,1134 0,661